# Altium PCB Stamp-S3Bat_SMD.PcbDoc
Units mil, origin at the board's own origin, x right, y up, seen from the top; angles counter-clockwise.
Board outline 6000 x 4000 mil, 2 copper layers (Top Layer, Bottom Layer); 1 components, 0 nets, 39 pads, 0 vias.
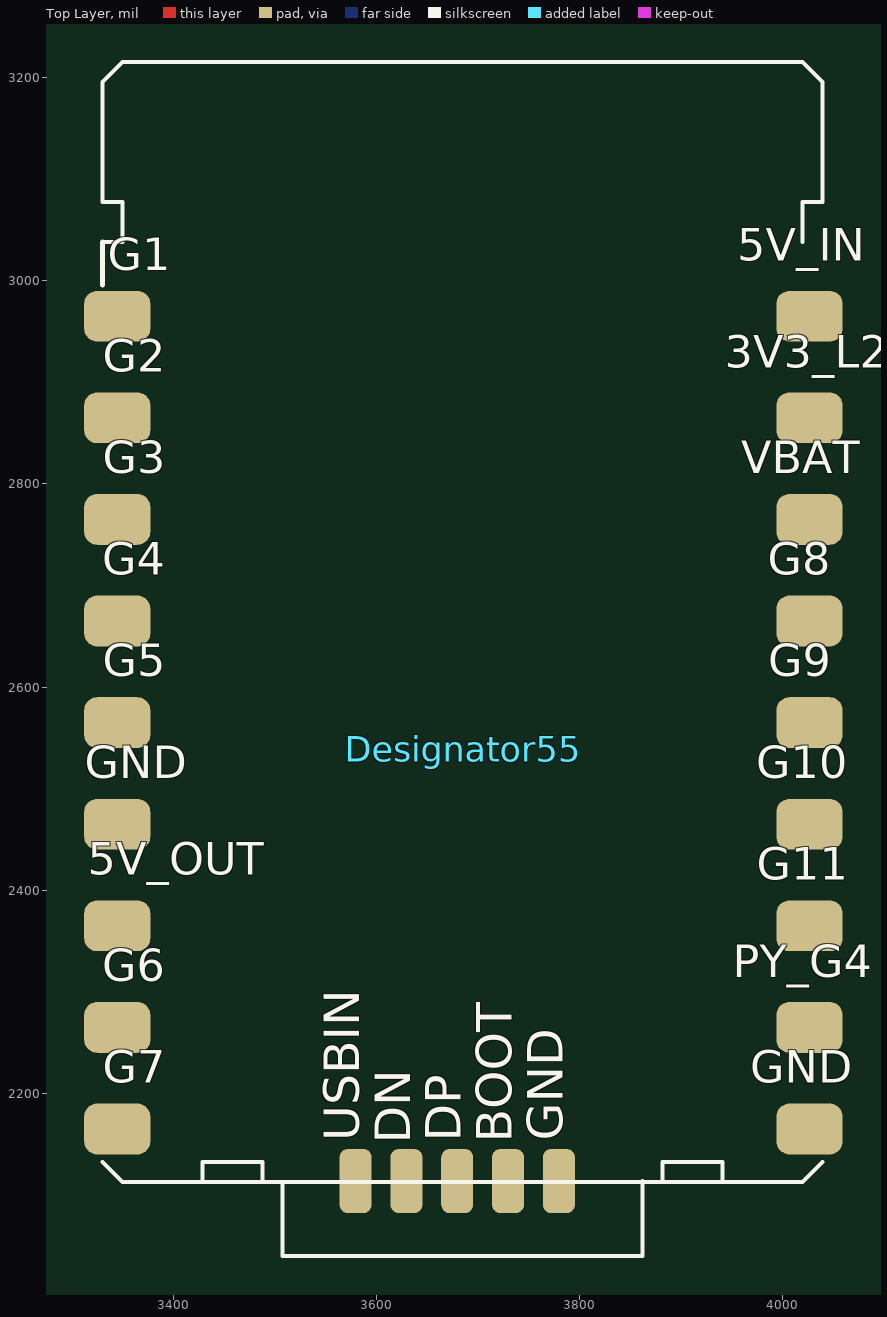
[diagram p0: Top Layer view]
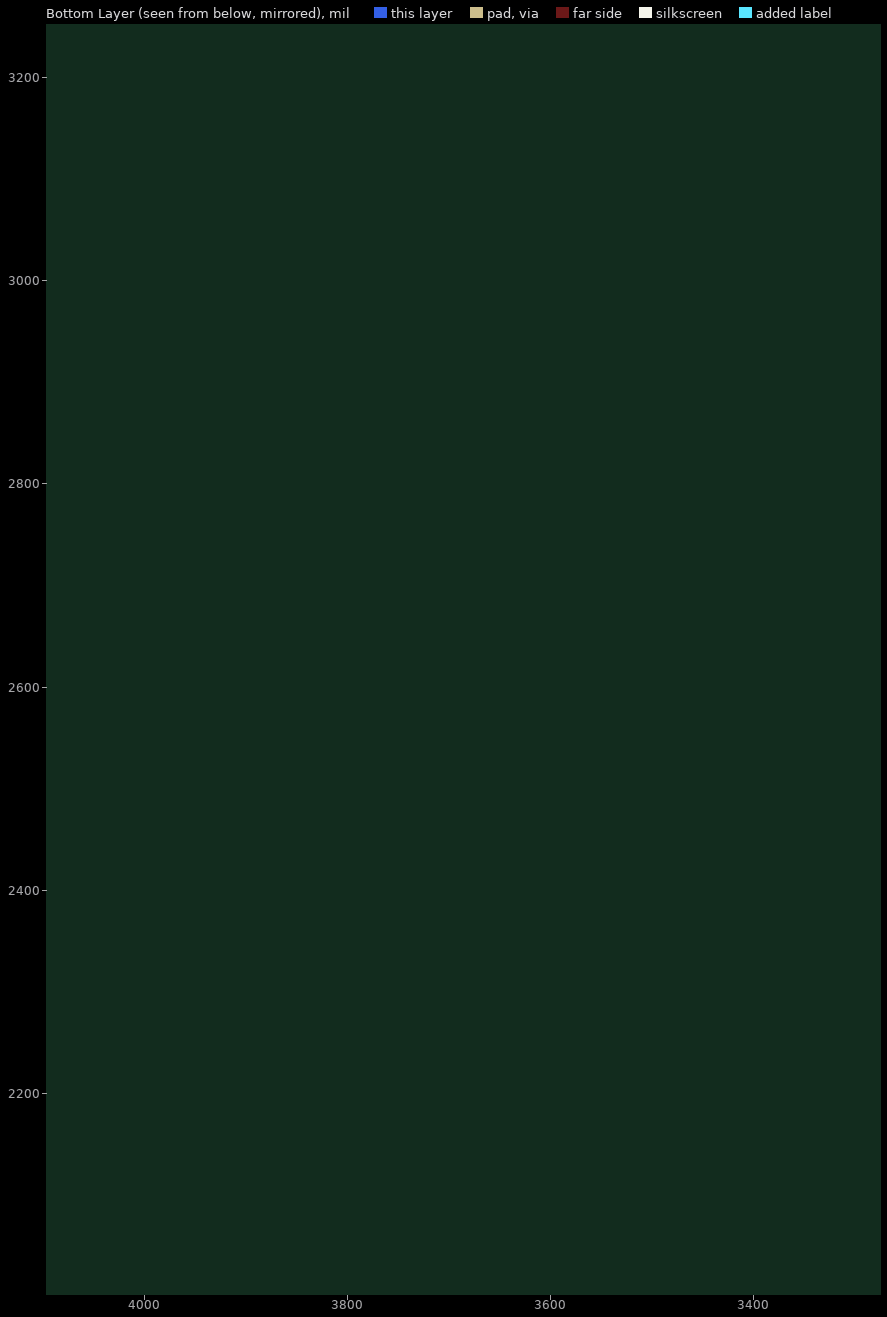
[diagram p1: Bottom Layer view, seen from below]

## Layer stack, top to bottom
Top Solder: solder mask 0.4, Solder Resist, Dk 3.5
Top Layer: signal copper 1.4
Dielectric 1: dielectric 12.6, FR-4, Dk 4.8
Bottom Layer: signal copper 1.4
Bottom Solder: solder mask 0.4, Solder Resist, Dk 3.5

## Board outline
1000,1000 7000,1000 7000,5000 1000,5000

## Design rules (kind name [scope] priority, off if disabled: settings)
Clearance [All] p1: gap=10 ignorepadtopadclearanceinfootprint=FALSE
PolygonConnect [All] p1: connectstyle=Relief reliefconductorwidth=10 reliefentries=4 polygonreliefangle="90 Angle" airgapwidth=10
RoutingVias [All] p1: holewidth=28 width=50 viastyle="Through Hole" minholewidth=28 minwidth=50 maxholewidth=28 maxwidth=50
SolderMaskExpansion [All] p1: expansion=4 istentingtop=FALSE
Width [All] p1: maxlimit=10 minlimit=10 preferedwidth=10
30 further rules are at their usual default settings.

## Components (designator, comment, footprint, x,y, rotation, side; value= is the part's Value field where it differs from the comment)
Designator55 "Comment" Stamp-S3BAT 3679.65,2113.82 r0 top

## Footprints (in the part's own frame and the unit in brackets; to place one, negate y for a bottom-side part, rotate by r counter-clockwise, add the part's x,y. Pads: shape width x height; smd on the part's side, far side on the other; paste and mask are expansions set on the pad)
Stamp-S3BAT [mm]
  rrect50% 1.651x1.27 smd: 1(-8.5,21.62) 2(-8.5,19.08) 3(-8.5,16.54) 3(-8.5,16.54) 4(-8.5,14) 4(-8.5,14) 5(-8.5,11.46) 5(-8.5,11.46) 6(-8.5,8.92) 6(-8.5,8.92) 7(-8.5,6.38) 7(-8.5,6.38) 8(-8.5,3.84) 8(-8.5,3.84) 9(-8.5,1.3) 9(-8.5,1.3) 10(8.808,1.3) 10(8.808,1.3) 11(8.808,3.84) 11(8.808,3.84) 12(8.808,6.38) 12(8.808,6.38) 13(8.808,8.92) 13(8.808,8.92) 14(8.808,11.46) 14(8.808,11.46) 15(8.808,14) 15(8.808,14) 16(8.808,16.54) 16(8.808,16.54) 17(8.808,19.08) 17(8.808,19.08) 18(8.808,21.62) 18(8.808,21.62)
  rrect50% 0.8x1.6 smd paste-2539.97 mask+0.051: 19(-2.54,0) 20(-1.27,0) 21(0,0) 22(1.27,0) 23(2.54,0)
  silkscreen extent -8.87,-1.88 9.13,27.97, body extent -9.42,-1.73 9.73,28.05, height 4.28

## Nets (pads, with @x,y where several pads share a name; then routed paths per layer and width w, separated by ;. In a path a pad name is that pad's centre, name@x,y a point inside that pad or via, vN(x,y) a via of type N, cw(c..) or ccw(c..) an arc to the next point about the centre after c; other vN are vias at no path point)
pads on no net: Designator55.1 Designator55.2 Designator55.3 Designator55.4 Designator55.5 Designator55.6 Designator55.7 Designator55.8 Designator55.9 Designator55.10 Designator55.11 Designator55.12 Designator55.13 Designator55.14 Designator55.15 Designator55.16 Designator55.17 Designator55.18 Designator55.19 Designator55.20 Designator55.21 Designator55.22 Designator55.23

## Text inside footprints (layer, text, board x,y; h text height)
Designator55: Top Overlay "G1" at 3335.75,2999.59 h55; Top Overlay "G2" at 3330.6,2899.59 h55; Top Overlay "G3" at 3330.65,2799.59 h55; Top Overlay "G4" at 3330.14,2699.59 h55; Top Overlay "G5" at 3330.75,2599.59 h55; Top Overlay "GND" at 3312.88,2499.59 h55; Top Overlay "5V_OUT" at 3315.75,2404.36 h55; Top Overlay "G6" at 3330.39,2299.59 h55; Top Overlay "G7" at 3330.6,2199.59 h55; Top Overlay "GND" at 3967.88,2199.59 h55; Top Overlay "PY_G4" at 3950.96,2303.36 h55; Top Overlay "G11" at 3974.32,2399.59 h55; Top Overlay "G10" at 3973.86,2499.59 h55; Top Overlay "G9" at 3985.54,2599.59 h55; Top Overlay "G8" at 3985.39,2699.59 h55; Top Overlay "VBAT" at 3959.25,2799.59 h55; Top Overlay "3V3_L2" at 3943.17,2903.36 h55; Top Overlay "5V_IN" at 3955.44,3008.54 h55; Top Overlay "USBIN" at 3595.16,2153.07 h60 r90; Top Overlay "DN" at 3645.13,2150.54 h60 r90; Top Overlay "DP" at 3695.07,2152.71 h60 r90; Top Overlay "BOOT" at 3745.16,2151.49 h60 r90; Top Overlay "GND" at 3795.16,2153.28 h60 r90